# EAGLE board PM12VPowerSupp (EAGLE 7.7.0)
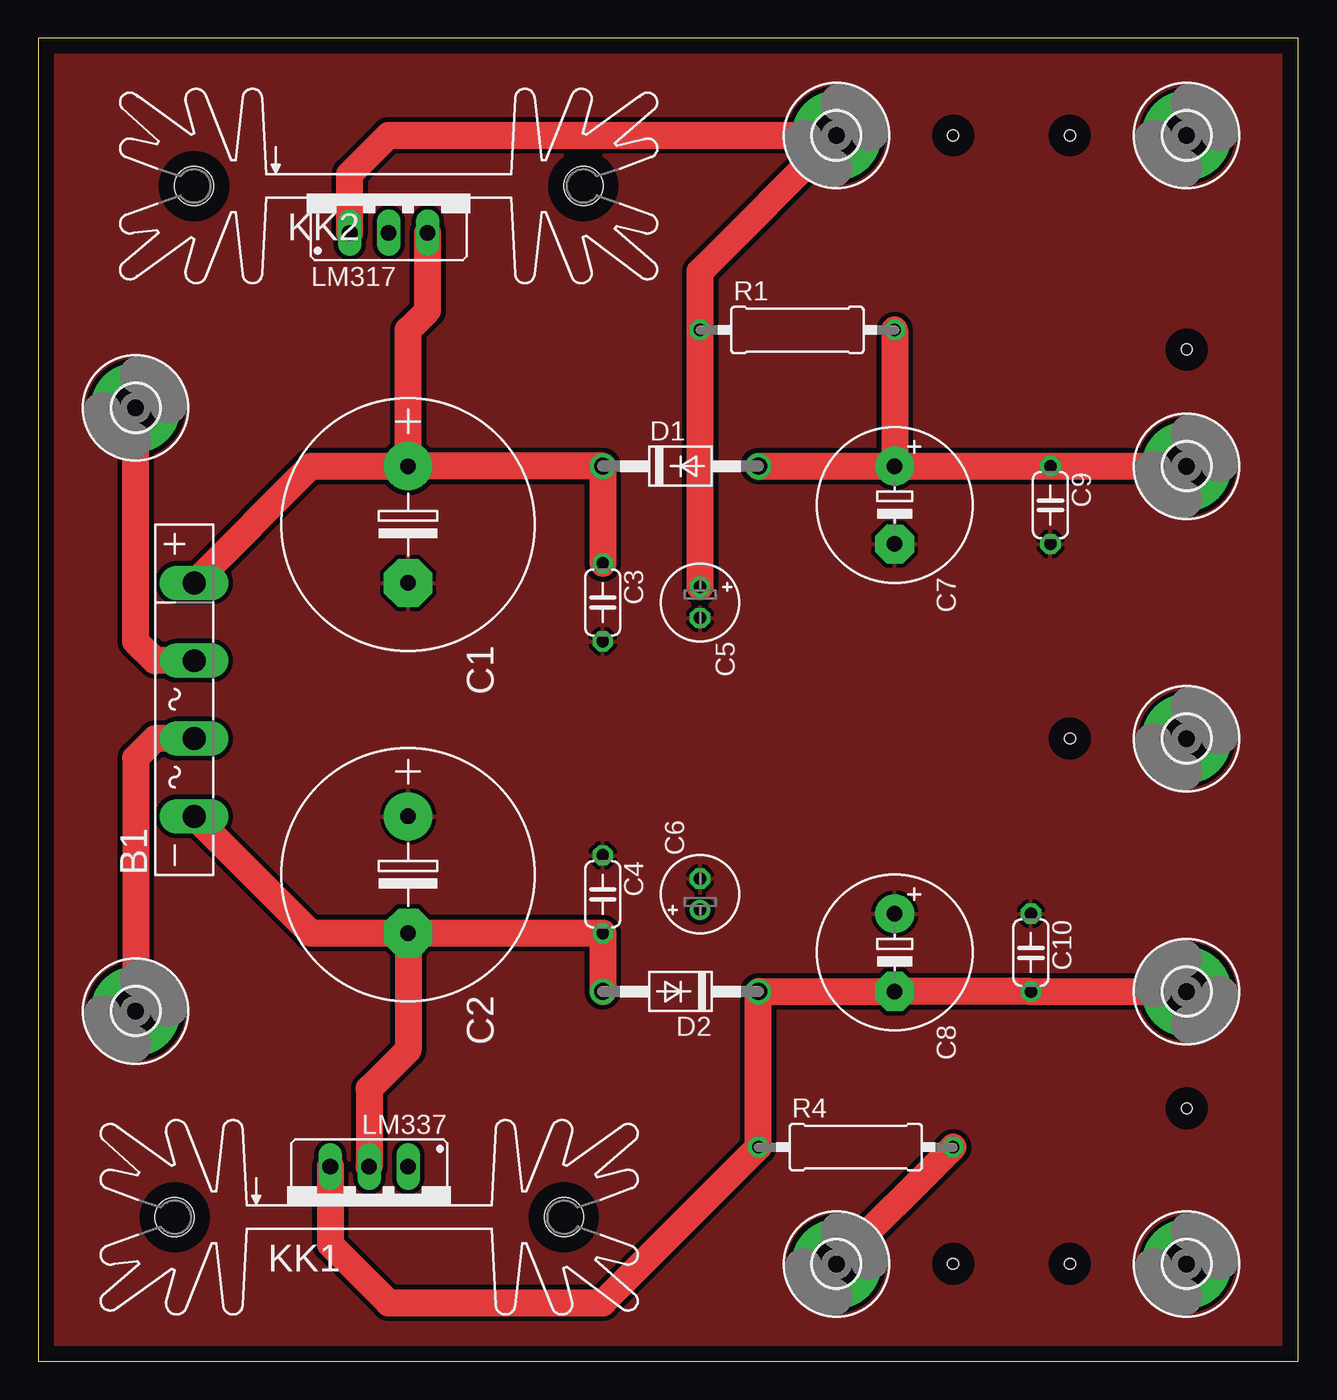
[diagram p0: board, top side]
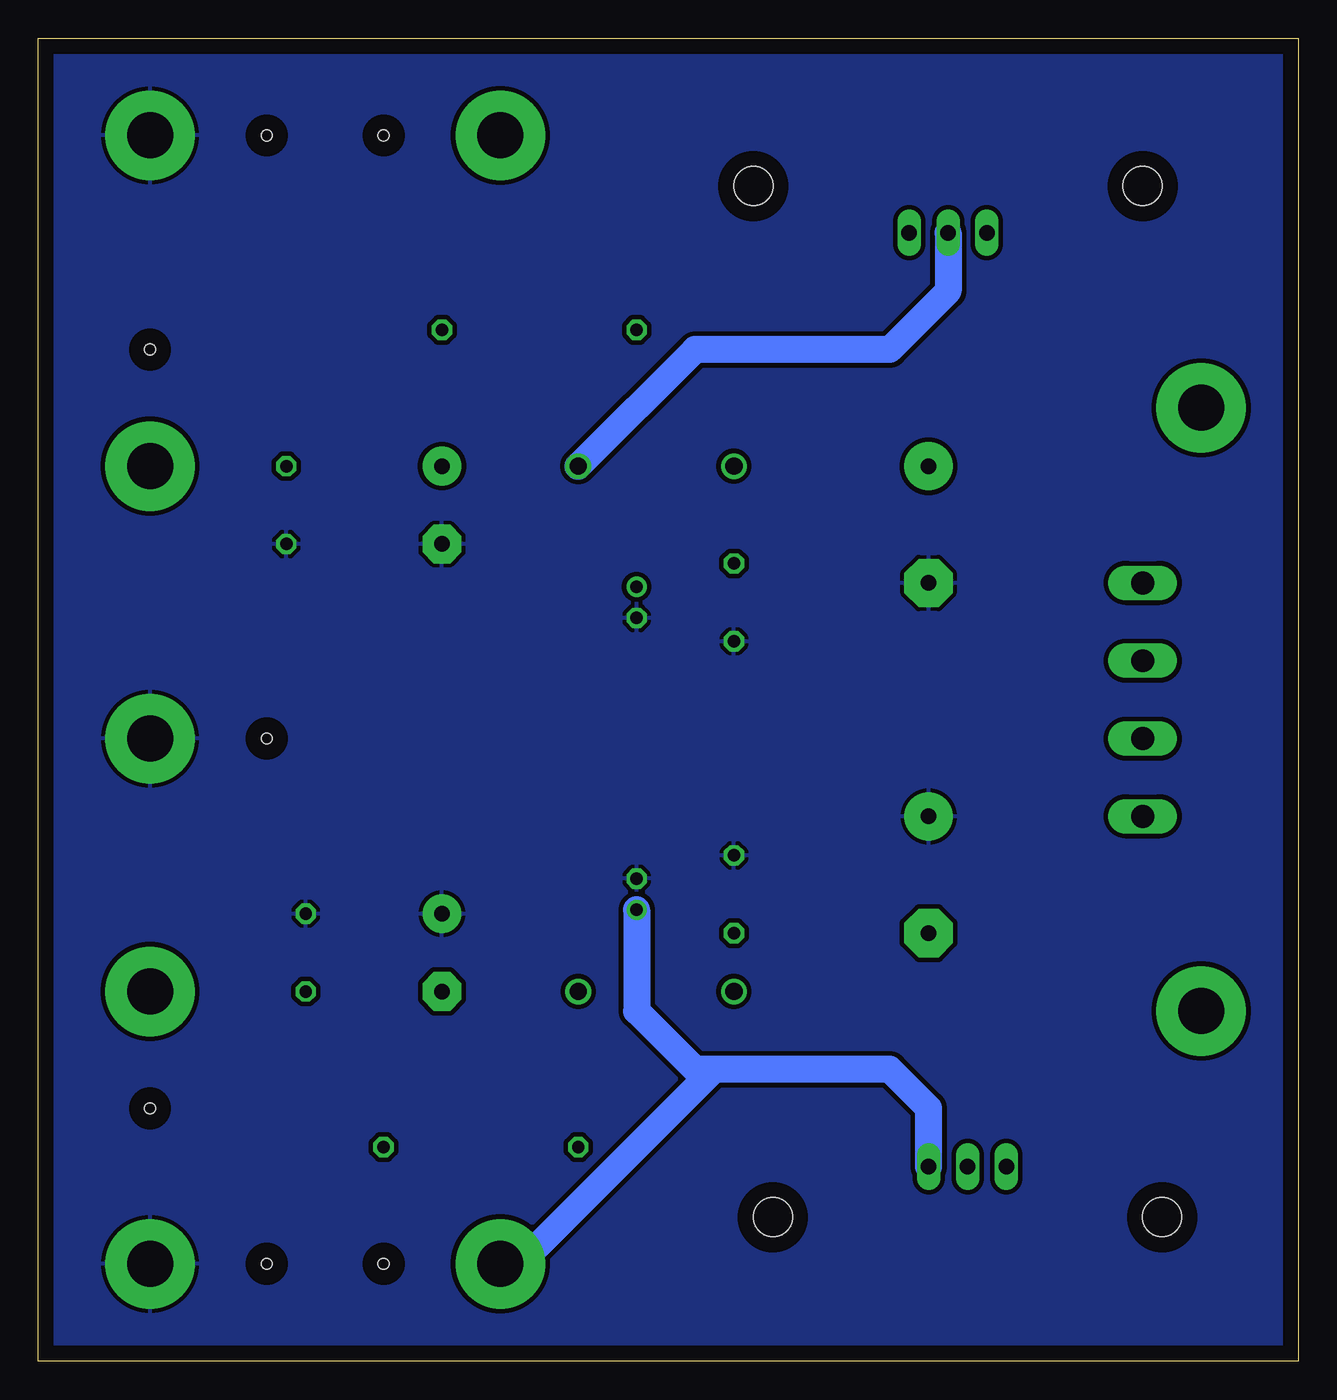
[diagram p1: board, bottom side, seen from below]

Size 82.22 x 86.35 mm. Coordinates in mm from the lower left corner, seen from the top.
Outline: 0,0 82.22,0 82.22,86.35 0,86.35 0,0
Copper layers (1*16): Top 0.035mm / dielectric 1.5mm / Bottom 0.035mm
Design rules "default": minimum track width 10mil, minimum drill 24mil, track to track 8mil, track to pad 8mil, pad to pad 8mil, via to via 8mil, smd to smd 8mil, copper to edge 40mil, drill to drill 8mil, minimum pad ring 10mil, minimum via ring 8mil, stop-mask expansion 4mil, vias tented up to drill 0mil, thermal gap 10mil
Holes 0.7 mm at 59.69,6.35 67.31,6.35 74.93,16.51 67.31,40.64 74.93,66.04 59.69,80.01 67.31,80.01

## Footprints (pad centres in the part's own frame; a part is rotated, then mirrored left to right if it is on the bottom)
3,0-PAD = drill 3 pad 5.842: B3,0 0,0
GBU4S = drill 1.499 long: + 7.62,0; - -7.62,0; AC1 2.54,0; AC2 -2.54,0
E7,5-16 = drill 1.016 pad 3.15: + -3.81,0 | drill 1.016 pad 3.15 octagon: - 3.81,0
C050-024X044 = drill 0.813 octagon: 1 -2.54,0; 2 2.54,0
E2-5 = drill 0.813 pad 1.27: + -1.016,0 | drill 0.813 pad 1.27 octagon: - 1.016,0
E5-10,5 = drill 1.016 pad 2.54: + -2.54,0 | drill 1.016 pad 2.54 octagon: - 2.54,0
DO41-10 = drill 1.118: A 5.08,0; C -5.08,0
SK104 = hole 2.54: -12.7,-0.762; 12.7,-0.762
317TS = drill 1.016 long: 1 -2.54,-2.54; 2 0,-2.54; 3 2.54,-2.54
337TS = drill 1.016 long: 1 -2.54,-2.54; 2 0,-2.54; 3 2.54,-2.54
0309/12 = drill 0.813 octagon: 1 -6.35,0; 2 6.35,0

## Placement (x,y rotation side)
AC1  MOUNT-PAD-ROUND3.0  [3,0-PAD]  6.35,62.23 0 top
AC2  MOUNT-PAD-ROUND3.0  [3,0-PAD]  6.35,22.86 0 top
B1  [GBU4S]  10.16,43.18 90 top
C1  2200uF  [E7,5-16]  24.13,54.61 270 top
C2  2200uF  [E7,5-16]  24.13,31.75 270 top
C3  470pF  [C050-024X044]  36.83,49.53 270 top
C4  470pF  [C050-024X044]  36.83,30.48 270 top
C5  10uF  [E2-5]  43.18,49.53 270 top
C6  10uF  [E2-5]  43.18,30.48 90 top
C7  470uF  [E5-10,5]  55.88,55.88 270 top
C8  470uF  [E5-10,5]  55.88,26.67 270 top
C9  470pF  [C050-024X044]  66.04,55.88 270 top
C10  470pF  [C050-024X044]  64.77,26.67 270 top
D1  1N4004  [DO41-10]  41.91,58.42 0 top
D2  1N4004  [DO41-10]  41.91,24.13 180 top
FRAME1  FRAME-LETTER  [CREATIVE_COMMONS]  -101.6,29.21 0 top  (outside the outline)
GND  MOUNT-PAD-ROUND3.0  [3,0-PAD]  74.93,80.01 0 top
KK1  SK104  [SK104]  21.59,10.16 0 top
KK2  SK104  [SK104]  22.86,77.47 0 top
LM317  [317TS]  22.86,76.2 0 top
LM337  [337TS]  21.59,10.16 180 top
NEG_TRIM_GND  MOUNT-PAD-ROUND3.0  [3,0-PAD]  74.93,6.35 0 top
NEG_TRIM_LEAD  MOUNT-PAD-ROUND3.0  [3,0-PAD]  52.07,6.35 0 top
POS_TRIM_GND  MOUNT-PAD-ROUND3.0  [3,0-PAD]  74.93,40.64 0 top
POS_TRIM_LEAD  MOUNT-PAD-ROUND3.0  [3,0-PAD]  52.07,80.01 0 top
R1  240  [0309/12]  49.53,67.31 0 top
R4  240  [0309/12]  53.34,13.97 0 top
VDC+  MOUNT-PAD-ROUND3.0  [3,0-PAD]  74.93,58.42 0 top
VDC-  MOUNT-PAD-ROUND3.0  [3,0-PAD]  74.93,24.13 90 top

## Library data of the parts
AC1 AC2 GND NEG_TRIM_GND NEG_TRIM_LEAD POS_TRIM_GND POS_TRIM_LEAD VDC+ VDC- = holes
B1 = rectifier
C1-C10 = rcl
D1 D2 = diode
FRAME1 = SparkFun-Aesthetics
KK1 KK2 = heatsink
LM317 LM337 = v-reg
R1 R4 = resistor

## Nets
AC1_INPUT: AC1.B3,0 B1.AC1
GND: C1.- C2.+ C3.2 C4.1 C5.- C6.- C7.- C8.+ C9.2 C10.1 GND.B3,0 NEG_TRIM_GND.B3,0 POS_TRIM_GND.B3,0
N$1: AC2.B3,0 B1.AC2
N$4: B1.- C2.- C4.2 D2.A LM337.2
N$5: B1.+ C1.+ C3.1 D1.C LM317.3
NEG_TRIM: C6.+ LM337.1 NEG_TRIM_LEAD.B3,0 R4.2
POS_TRIM: C5.+ LM317.1 POS_TRIM_LEAD.B3,0 R1.1
VDC+: C7.+ C9.1 D1.A LM317.2 R1.2 VDC+.B3,0
VDC-: C8.- C10.2 D2.C LM337.3 R4.1 VDC-.B3,0

## Tracks (layer width: path | path; a pad name or v marks a point on that pad's centre or on a via)
AC1_INPUT
  Top 1.778: B1.AC1 7.62,45.72 6.35,46.99 AC1.B3,0
GND
  pour Top (isolate 0.305): 0,86.36 0,0 82.55,0 82.55,86.36
  pour Bottom (isolate 0.305): 0,86.36 0,0 82.55,0 82.55,86.36
N$1
  Top 1.778: B1.AC2 7.62,40.64 6.35,39.37 AC2.B3,0
N$4
  Top 1.778: B1.- 17.78,27.94 C2.- | C2.- C4.2 D2.A | C2.- 24.13,20.32 21.59,17.78 LM337.2
N$5
  Top 1.778: B1.+ 17.78,58.42 C1.+ | C1.+ D1.C C3.1 | C1.+ 24.13,67.31 25.4,68.58 LM317.3
NEG_TRIM
  Top 1.778: R4.2 NEG_TRIM_LEAD.B3,0
  Bottom 1.778: LM337.1 24.13,16.51 26.67,19.05 38.1,19.05 | 38.1,19.05 39.37,19.05 43.18,22.86 C6.+ | NEG_TRIM_LEAD.B3,0 50.8,6.35 38.1,19.05
POS_TRIM
  Top 1.778: C5.+ R1.1 43.18,71.12 POS_TRIM_LEAD.B3,0 22.86,80.01 20.32,77.47 LM317.1
VDC+
  Top 1.778: D1.A C7.+ | C7.+ C9.1 VDC+.B3,0 | R1.2 C7.+
  Bottom 1.778: LM317.2 22.86,69.85 26.67,66.04 39.37,66.04 D1.A
VDC-
  Top 1.778: VDC-.B3,0 C10.2 C8.- D2.C R4.1 36.83,3.81 22.86,3.81 19.05,7.62 LM337.3